# Altium PCB CF_ESP32_S3_CAM_BOARD.PcbDoc
Units mm, origin at the board's own origin, x right, y up, seen from the top; angles counter-clockwise.
Board outline 25.2 x 27.3 mm, 2 copper layers (F.Cu, B.Cu); 3 components, 20 nets, 60 pads, 0 vias.
Unrouted connection lines stored in the file: 20.
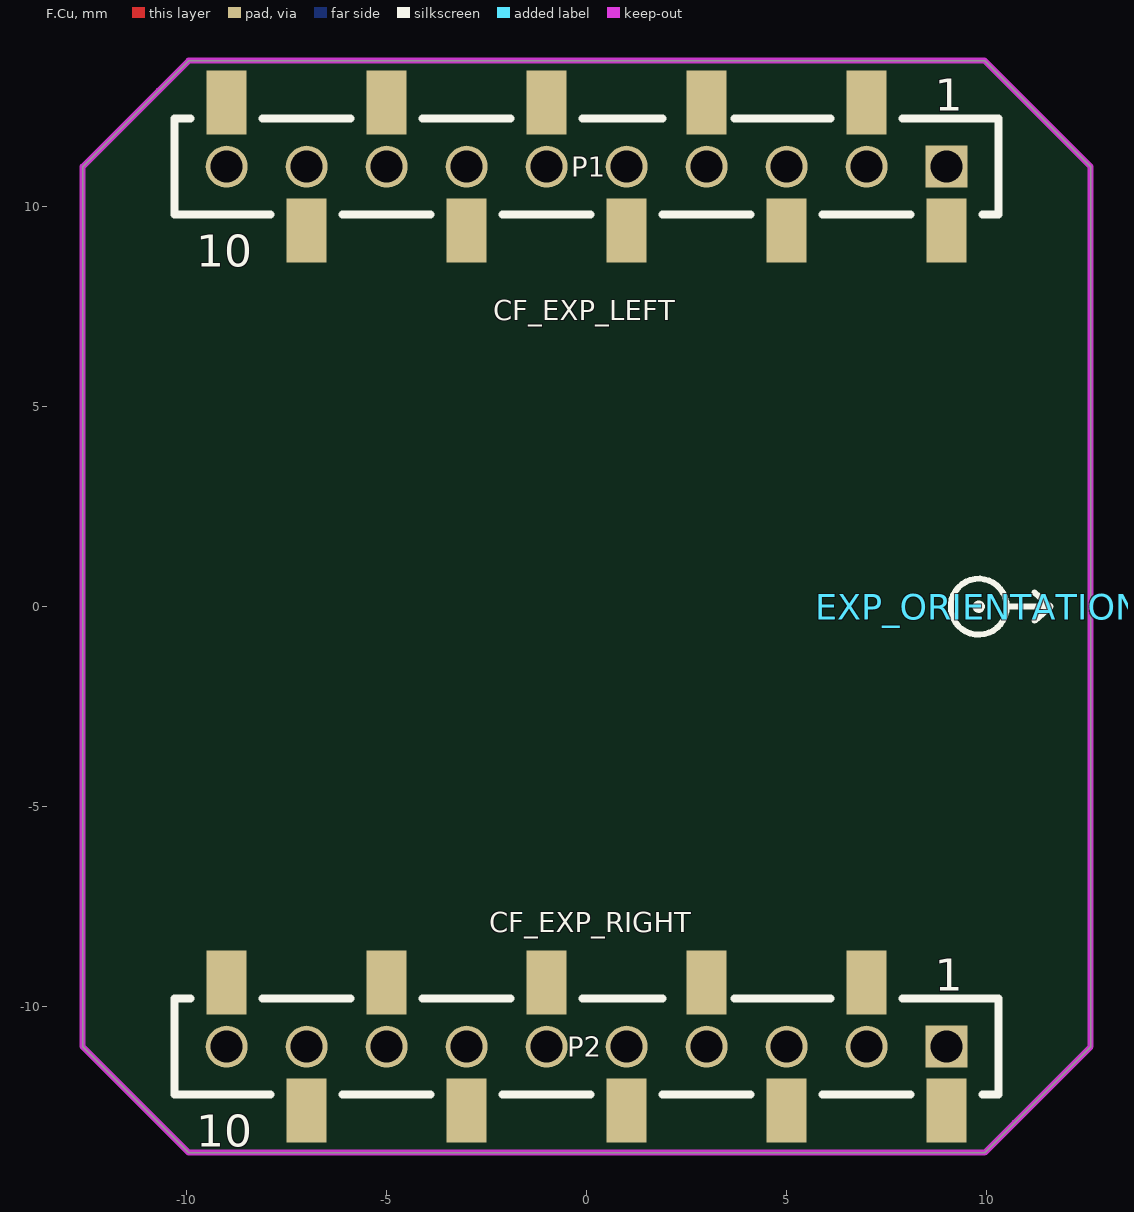
[diagram p0: F.Cu view]
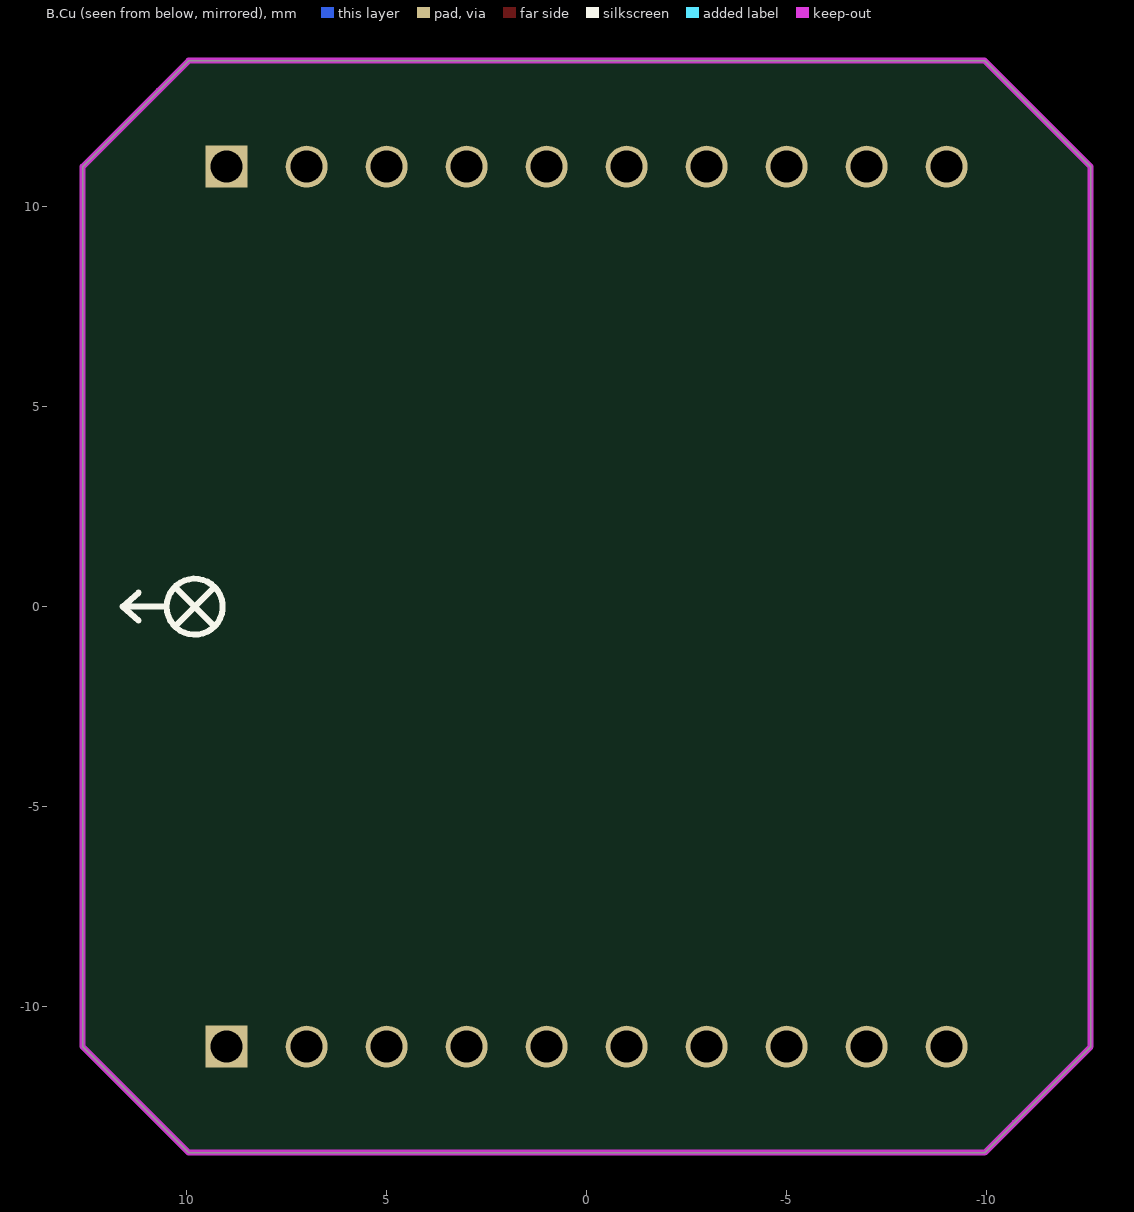
[diagram p1: B.Cu view, seen from below]

## Layer stack, top to bottom
F.Mask: solder mask 0.0102, Solder Resist, Dk 3.5
F.Cu: signal copper 0.0356
Dielectric 1: dielectric 0.32, FR-4, Dk 4.8
B.Cu: signal copper 0.0356
B.Mask: solder mask 0.0102, Solder Resist, Dk 3.5

## Board outline
2.75,13.65 9.95,13.65 10.7,12.9 12.6,11 12.6,-9.2 12.6,-11 10.7,-12.9 9.95,-13.65 0,-13.65 -9.95,-13.65 -10.7,-12.9 -12.6,-11 -12.6,11 -10.7,12.9 -9.95,13.65 2.75,13.65

## Design rules (kind name [scope] priority, off if disabled: settings)
Clearance "Clearence 0.1524_NetClass" [InNetClass('Default')] p1: gap=0.152 ignorepadtopadclearanceinfootprint=FALSE
HoleSize "Hole Size (Default)" [All] p1: absolutevalues=TRUE maxlimit=10 minlimit=0.381 maxpercent=80.000 minpercent=20.000
MinimumSolderMaskSliver [All] p1: minsoldermaskwidth=0
PolygonConnect [All] p1: connectstyle=Direct reliefconductorwidth=0.254 reliefentries=4 polygonreliefangle="90 Angle" airgapwidth=0.254
RoutingVias [All] p1: holewidth=0.711 width=1.27 viastyle="Through Hole" minholewidth=0.711 minwidth=1.27 maxholewidth=0.711 maxwidth=1.27
SilkToSilkClearance [All] p1: silktosilkclearance=0
SilkToSolderMaskClearance [IsPad] p1: minsilkscreentomaskgap=0 clearancetoexposedcopper=TRUE
SolderMaskExpansion [All] p1: expansion=0.102 istentingtop=FALSE
Width [All] p1: maxlimit=0.254 minlimit=0.254 preferedwidth=0.254
26 further rules are at their usual default settings.

## Classes and differential pairs
net class Default: Net-(P1-Pad1) Net-(P1-Pad2) Net-(P1-Pad3) Net-(P1-Pad4) Net-(P1-Pad5) Net-(P1-Pad6) Net-(P1-Pad7) Net-(P1-Pad8) Net-(P1-Pad9) Net-(P1-Pad10) Net-(P2-Pad1) Net-(P2-Pad2) Net-(P2-Pad3) Net-(P2-Pad4) Net-(P2-Pad5) Net-(P2-Pad6) Net-(P2-Pad7) Net-(P2-Pad8) Net-(P2-Pad9) Net-(P2-Pad10)

## Components (designator, comment, footprint, x,y, rotation, side; value= is the part's Value field where it differs from the comment)
EXP_ORIENTATION "VAL**" EXP_ORIENTATION 9.8,0 r0 top
P1 "CF_EXP_LEFT" BF090-10-X-B2 0,11 r180 top
P2 "CF_EXP_RIGHT" BF090-10-X-B2 0,-11 r180 top

## Footprints (in the part's own frame and the unit in brackets; to place one, negate y for a bottom-side part, rotate by r counter-clockwise, add the part's x,y. Pads: shape width x height; smd on the part's side, far side on the other; paste and mask are expansions set on the pad)
BF090-10-X-B2 [mm]
  rect 1.05x1.05 hole 0.8 paste-2539.97 mask-1.05: 1(-9,0)
  round 1.05 smd paste-1.05 mask-0.05: 1(-9,0) 2(-7,0) 3(-5,0) 4(-3,0) 5(-1,0) 6(1,0) 7(3,0) 8(5,0) 9(7,0) 10(9,0)
  rect 1x1.6 smd paste-0.03 mask+0: 1(-9,1.6) 2(-7,-1.6) 3(-5,1.6) 4(-3,-1.6) 5(-1,1.6) 6(1,-1.6) 7(3,1.6) 8(5,-1.6) 9(7,1.6) 10(9,-1.6)
  round 1.05 hole 0.8 paste-2539.97 mask-1.05: 2(-7,0) 3(-5,0) 4(-3,0) 5(-1,0) 6(1,0) 7(3,0) 8(5,0) 9(7,0) 10(9,0)
  silkscreen extent -10.3,-1.2 10.3,1.2
EXP_ORIENTATION [mm]
  silkscreen extent -0.7,-0.7 1.8,0.7

## Part data
EXP_ORIENTATION: library part EXP_ORIENTATION
P1 P2: library part BF090-10-X-B2

## Nets (pads, with @x,y where several pads share a name; then routed paths per layer and width w, separated by ;. In a path a pad name is that pad's centre, name@x,y a point inside that pad or via, vN(x,y) a via of type N, cw(c..) or ccw(c..) an arc to the next point about the centre after c; other vN are vias at no path point)
Net-(P1-Pad1): P1.1
Net-(P1-Pad2): P1.2
Net-(P1-Pad3): P1.3
Net-(P1-Pad4): P1.4
Net-(P1-Pad5): P1.5
Net-(P1-Pad6): P1.6
Net-(P1-Pad7): P1.7
Net-(P1-Pad8): P1.8
Net-(P1-Pad9): P1.9
Net-(P1-Pad10): P1.10
Net-(P2-Pad1): P2.1
Net-(P2-Pad2): P2.2
Net-(P2-Pad3): P2.3
Net-(P2-Pad4): P2.4
Net-(P2-Pad5): P2.5
Net-(P2-Pad6): P2.6
Net-(P2-Pad7): P2.7
Net-(P2-Pad8): P2.8
Net-(P2-Pad9): P2.9
Net-(P2-Pad10): P2.10

## Keep-outs
Edge.Cuts:
  lines w0.15: -12.6,-11 -12.6,11 ; -12.6,-11 -10.7,-12.9 ; -12.6,-11 -12.6,11 ; -12.6,-11 -10.7,-12.9 ; -12.6,11 -10.7,12.9 ; -12.6,11 -10.7,12.9 ; -10.7,-12.9 -9.95,-13.65 ; -10.7,-12.9 -9.95,-13.65 ; -10.7,12.9 -9.95,13.65 ; -10.7,12.9 -9.95,13.65 ; -9.95,-13.65 0,-13.65 ; -9.95,-13.65 0,-13.65 ; -9.95,13.65 2.75,13.65 ; -9.95,13.65 2.75,13.65 ; 0,-13.65 9.95,-13.65 ; 0,-13.65 9.95,-13.65 ; 2.75,13.65 9.95,13.65 ; 2.75,13.65 9.95,13.65 ; 9.95,-13.65 10.7,-12.9 ; 9.95,-13.65 10.7,-12.9 ; 9.95,13.65 10.7,12.9 ; 9.95,13.65 10.7,12.9 ; 10.7,-12.9 12.6,-11 ; 10.7,-12.9 12.6,-11 ; 10.7,12.9 12.6,11 ; 10.7,12.9 12.6,11 ; 12.6,-11 12.6,-9.2 ; 12.6,-11 12.6,-9.2 ; 12.6,-9.2 12.6,11 ; 12.6,-9.2 12.6,11

## Silkscreen, mask and mechanical layers (free items; w line width, h text height)
Eco1.User:
  drawing of 1840 lines, arcs and shapes, not listed
  text "Bitcraze" at -19.445,20.539 h1 r135
  text "Crazyflie 2.0" at 20.531,19.201 h1 r45
  text "M2" at 14.55,13.298 h0.8 r135
  text "M1" at -13.581,12.571 h0.8 r45
  text "uUSB / TOP" at -18.35,0.507 h1 r90
  text "SWD / BOTTOM" at -9.2,0.143 h1 r90
  text "ANT" at 14.148,-0.65 h1
  text "BAT" at -14.65,-6.626 h1 r90
  text "BTN" at 14.392,-8.179 h1 r105
  text "M4" at -12.436,-13.715 h0.8 r135
  text "M3" at 13.298,-14.55 h0.8 r45
  text "Bitcraze" at 24.555,-23.461 h1 r135
  text "Crazyflie 2.0" at -25.469,-26.799 h1 r45

## Text inside footprints (layer, text, board x,y; h text height)
P1: F.SilkS "1" at 8.705,12.4 h0.8; F.SilkS "10" at -9.76,8.5 h0.8
P2: F.SilkS "1" at 8.705,-9.6 h0.8; F.SilkS "10" at -9.76,-13.5 h0.8